# Altium PCB Suprise.PcbDoc
Units mm, origin at the board's own origin, x right, y up, seen from the top; angles counter-clockwise.
Board outline 20 x 50 mm, 2 copper layers (Top Layer, Bottom Layer); 40 components, 25 nets, 139 pads, 38 vias.
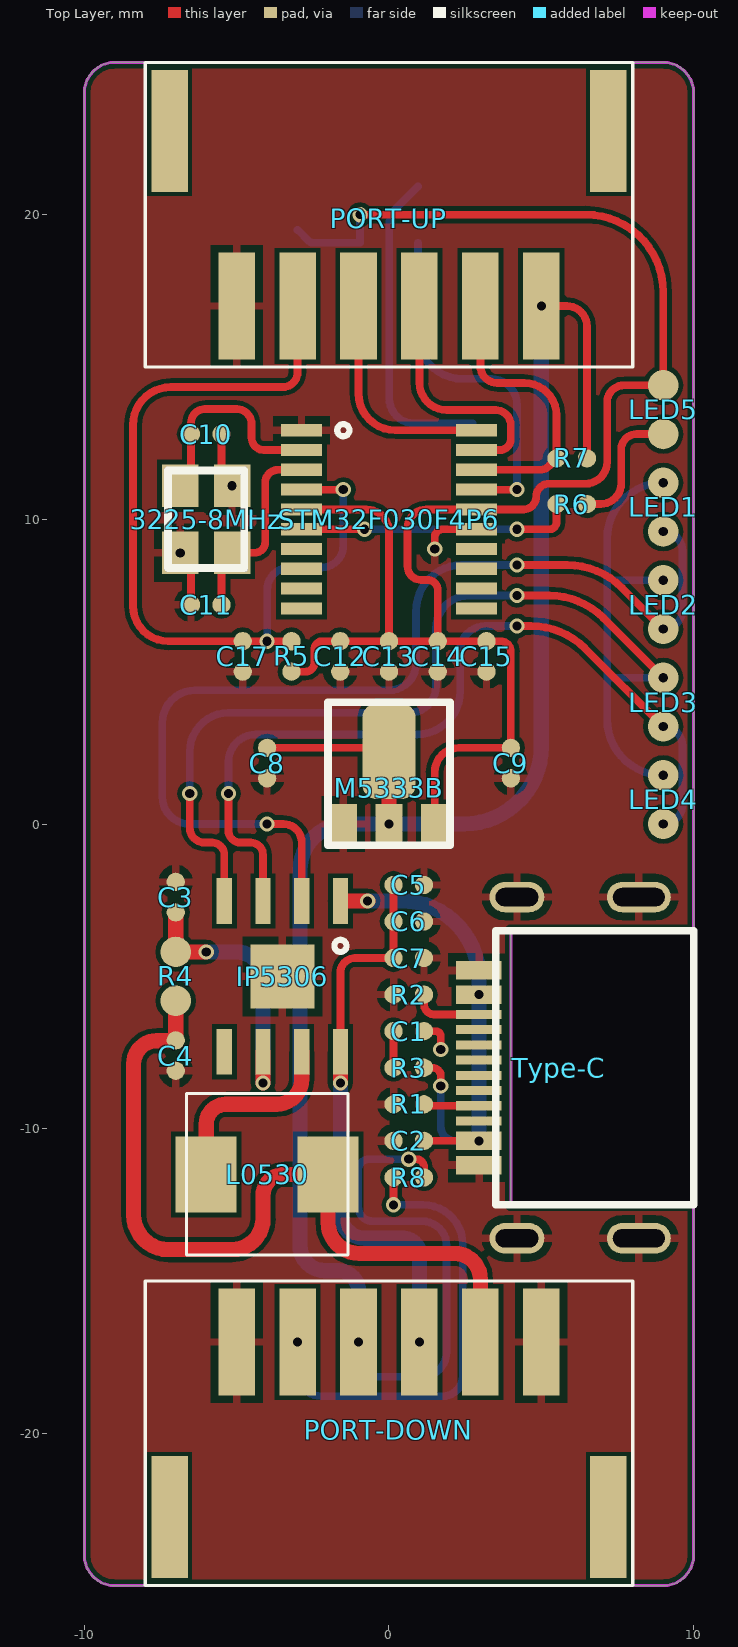
[diagram p0: Top Layer view]
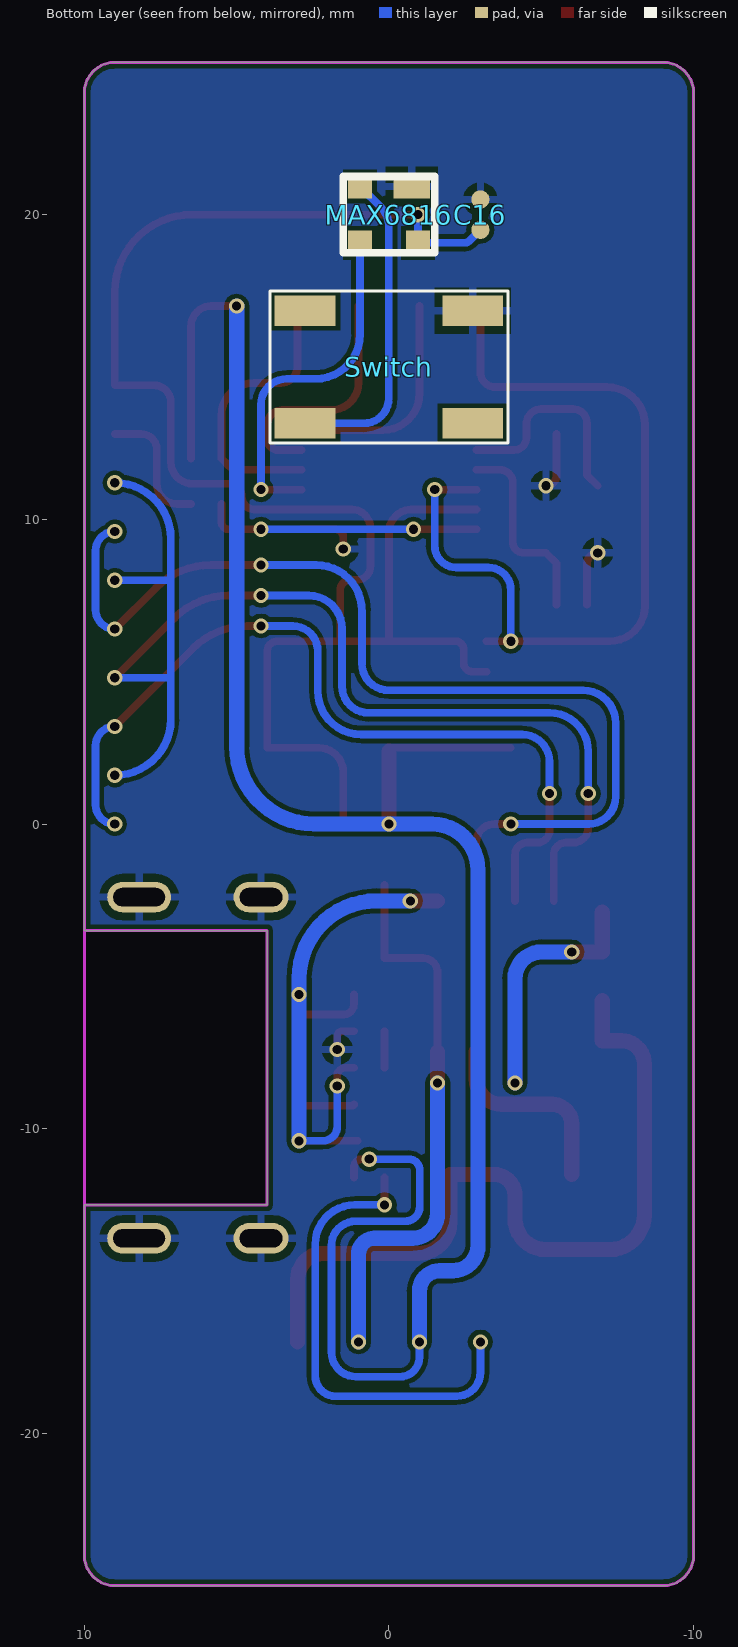
[diagram p1: Bottom Layer view, seen from below]

## Layer stack, top to bottom
Top Solder: solder mask 0.0102, Solder Resist, Dk 3.5
Top Layer: signal copper 0.0356
Dielectric 1: dielectric 0.32, FR-4, Dk 4.8
Bottom Layer: signal copper 0.0356
Bottom Solder: solder mask 0.0102, Solder Resist, Dk 3.5

## Board outline
-10,-24 -10,24 cw(c-9,24) -9,25 9,25 cw(c9,24) 10,24 10,-3.5 4,-3.5 4,-12.5 10,-12.5 10,-24 cw(c9,-24) 9,-25 -9,-25 cw(c-9,-24)

## Design rules (kind name [scope] priority, off if disabled: settings)
Clearance [All] p1: gap=0.15 ignorepadtopadclearanceinfootprint=FALSE
PolygonConnect [All] p1: connectstyle=Relief reliefconductorwidth=0.254 reliefentries=4 polygonreliefangle="90 Angle" airgapwidth=0.254
RoutingVias [All] p1: holewidth=0.711 width=1.27 viastyle="Through Hole" minholewidth=0.15 minwidth=0.3 maxholewidth=1 maxwidth=2
SolderMaskExpansion [All] p1: expansion=0.102
Width [All] p1: maxlimit=1 minlimit=0.15 preferedwidth=0.254
30 further rules are at their usual default settings.

## Components (designator, comment, footprint, x,y, rotation, side; value= is the part's Value field where it differs from the comment)
3225-8MHz "Crystal-3225" Crystal-3225 -6,10 r90 top locked
C1 "10U" CAP0402 0.65,-6.8 r90 top locked
C2 "10U" CAP0402 0.65,-10.4 r270 top locked
C3 "22U" CAP0402 -7,-2.4 r180 top locked
C4 "22U" CAP0402 -7,-7.6 r0 top locked
C5 "22U" CAP0402 0.65,-2 r90 top locked
C6 "22U" CAP0402 0.65,-3.2 r90 top locked
C7 "22U" CAP0402 0.65,-4.4 r90 top locked
C8 "106" CAP0402 -4,2 r0 top locked
C9 "107" CAP0402 4,2 r0 top locked
C10 "12P" CAP0402 -6,12.8 r90 top locked
C11 "12P" CAP0402 -6,7.2 r90 top locked
C12 "475" CAP0402 -1.6,5.5 r0 top locked
C13 "105" CAP0402 0,5.5 r0 top locked
C14 "105" CAP0402 1.6,5.5 r0 top locked
C15 "475" CAP0402 3.2,5.5 r0 top locked
C16 "105" CAP0402 -3,20 r0 bottom locked
C17 "105" CAP0402 -4.8,5.5 r0 top locked
IP5306 "IP5306" IP5306 -3.5,-5 r270 top locked
L0530 "IND0530" IND0530 -4,-11.5 r0 top locked
LED1 "LED0603" LED0603 9,10.4 r180 top locked
LED2 "LED0603" LED0603 9,7.2 r0 top locked
LED3 "LED0603" LED0603 9,4 r180 top locked
LED4 "LED0603" LED0603 9,0.8 r0 top locked
LED5 "LED0603" LED0603 9,13.6 r0 top locked
M5333B "M5333B" M5333B 0,0 r0 top locked
MAX6816 "MAX6816" MAX6816 0,20 r0 bottom locked
PORT-DOWN "PH2.0-SMD-6Pin" PH2.0-SMD-6Pin 0,-17 r180 top locked
PORT-UP "PH2.0-SMD-6Pin" PH2.0-SMD-6Pin 0,17 r0 top locked
R1 "5K1" RES0402 0.65,-9.2 r90 top locked
R2 "5K1" RES0402 0.65,-5.6 r90 top locked
R3 "2R" RES0402 0.65,-8 r90 top locked
R4 "0.5R" RES0603 -7,-5 r180 top locked
R5 "10K" RES0402 -3.2,5.5 r0 top locked
R6 "300R" RES0402 6,10.5 r270 top locked
R7 "10K" RES0402 6,12 r270 top locked
R8 "300R" RES0402 0.65,-11.6 r90 top locked
STM32F030F4P6 "STM32F030F4P6" STM32F030F4P6 0,10 r0 top locked
Switch "Key-4*4*1.5" Key-4*4*1.5 0,15 r90 bottom locked
Type-C "Type-C-IN-16Pin" SinkBoard-Type-C-IN-16Pin 2.95,-8 r270 top locked

## Footprints (in the part's own frame and the unit in brackets; to place one, negate y for a bottom-side part, rotate by r counter-clockwise, add the part's x,y. Pads: shape width x height; smd on the part's side, far side on the other; paste and mask are expansions set on the pad)
CAP0402 [mm]
  round 0.6 smd: 1(0,0.5) 2(0,-0.5)
Crystal-3225 [mm]
  rect 1.4x1.2 smd: 1(-1.1,-0.85) 2(1.1,-0.85) 3(1.1,0.85) 4(-1.1,0.85)
  silkscreen extent -1.6,-1.25 1.6,1.25
IND0530 [mm]
  rect 2x2.5 smd: 1(-2,0) 2(2,0)
  silkscreen extent -2.65,-2.65 2.65,2.65
IP5306 [mm]
  rect 1.5x0.5 smd: 1(-2.475,1.905) 2(-2.475,0.635) 3(-2.475,-0.635) 4(-2.475,-1.905) 5(2.475,-1.905) 6(2.475,-0.635) 7(2.475,0.635) 8(2.475,1.905)
  rect 2.1x2.1 smd: 9(0,0)
  silkscreen extent -1.2,1.71 -0.8,2.1
Key-4*4*1.5 [mm]
  rect 1x2 smd: 1(-1.85,2.75) 2(1.85,-2.75) 3(1.85,2.75) 4(-1.85,-2.75)
  silkscreen extent -2.5,-3.9 2.5,3.9
LED0603 [mm]
  round 1 smd: 1(0,0.8) 2(0,-0.8)
M5333B [mm]
  rect 0.9x1.3 smd: 1(-1.5,0) 2(0,0) 3(1.5,0)
  rrect50% 1.733x3.125 smd: 2(0,2.388)
  silkscreen extent -2,-0.7 2,4
MAX6816 [mm]
  rect 1.2x0.8 smd: 1(-0.75,-0.925)
  rect 0.8x0.8 smd: 2(0.95,-0.925) 3(0.95,0.925) 4(-0.95,0.925)
  silkscreen extent -1.5,-1.25 1.5,1.25
PH2.0-SMD-6Pin [mm]
  rect 1.2x3.5 smd: 1(-5,0) 2(-3,0) 3(-1,0) 4(1,0) 5(3,0) 6(5,0)
  rect 1.2x4 smd: 7(7.2,5.75) 8(-7.2,5.75)
  silkscreen extent -8,-2 8,8
RES0402 [mm]
  round 0.6 smd: 1(0,0.5) 2(0,-0.5)
RES0603 [mm]
  round 1 smd: 1(0,0.8) 2(0,-0.8)
SinkBoard-Type-C-IN-16Pin [mm]
  oval 1x2.1 hole 1.7 slot 0.6 at 0 deg: 1(-5.6,5.25) 12(5.6,5.25)
  oval 1x1.8 hole 1.4 slot 0.6 at 0 deg: 1(-5.6,1.25) 12(5.6,1.25)
  rect 0.6x1.5 smd: 1(-3.2,0) 2(-2.4,0) 11(2.4,0) 12(3.2,0)
  rect 0.3x1.5 smd: 3(-1.75,0) 4(-1.25,0) 5(-0.75,0) 6(-0.25,0) 7(0.25,0) 8(0.75,0) 9(1.25,0) 10(1.75,0)
  silkscreen extent -4.5,0.55 4.5,7.05
STM32F030F4P6 [mm]
  rect 1.35x0.4 smd: 1(-2.875,2.925) 2(-2.875,2.275) 3(-2.875,1.625) 4(-2.875,0.975) 5(-2.875,0.325) 6(-2.875,-0.325) 7(-2.875,-0.975) 8(-2.875,-1.625) 9(-2.875,-2.275) 10(-2.875,-2.925) 11(2.875,-2.925) 12(2.875,-2.275) 13(2.875,-1.625) 14(2.875,-0.975) 15(2.875,-0.325) 16(2.875,0.325) 17(2.875,0.975) 18(2.875,1.625) 19(2.875,2.275) 20(2.875,2.925)
  silkscreen extent -1.7,2.73 -1.3,3.12

## Part data
C1 C2 C3 C4 C5 C6 C7 C8 C9 C10 C11 C12 C13 C14 C15 C16 C17: library part CAP0402
R1 R2 R3 R5 R6 R7 R8: library part RES0402
R4: library part RES0603

## Via types
v1: diameter 0.5, hole 0.3, Top Layer to Bottom Layer, 38 vias

## Nets (pads, with @x,y where several pads share a name; then routed paths per layer and width w, separated by ;. In a path a pad name is that pad's centre, name@x,y a point inside that pad or via, vN(x,y) a via of type N, cw(c..) or ccw(c..) an arc to the next point about the centre after c; other vN are vias at no path point)
3V3: C9.1 C12.1 C13.1 C14.1 C15.1 C16.1 LED5.1 M5333B.3 MAX6816.4 R5.2 STM32F030F4P6.5 STM32F030F4P6.16 | length 56.7
  Top Layer w0.254: R5.2 -2.74,5 ccw(c-2.74,5.29) -2.45,5.29 -2.45,5.728 cw(c-2.178,5.728) -2.178,6 C12.1 C13.1 ; STM32F030F4P6.5 -0.742,10.325 cw(c-0.742,9.583) 0,9.583 C13.1 ; v1(-0.95,20) 6.46,20 cw(c6.46,17.46) 9,17.46 LED5.1 7.717,14.4 ccw(c7.717,13.843) 7.16,13.843 7.16,11.88 cw(c6.45,11.88) 6.45,11.17 5.26,11.17 ccw(c5.26,10.74) 4.83,10.74 cw(c4.415,10.74) 4.415,10.325 STM32F030F4P6.16 1.224,10.325 ccw(c1.224,9.711) 0.61,9.711 0.61,8.46 ccw(c1.06,8.46) 1.06,8.01 1.273,8.01 cw(c1.273,7.683) 1.6,7.683 C14.1 ; M5333B.3 1.5,1.7 cw(c2.3,1.7) 2.3,2.5 C9.1 4,5.659 ccw(c3.659,5.659) 3.659,6 C15.1 C14.1 ; C13.1 C14.1
  Bottom Layer w0.254: C16.1 -2.65,19.15 ccw(c-2.469,19.331) -2.469,19.075 MAX6816.4 v1(-0.95,20)
5VIN: C8.1 M5333B.2 PORT-DOWN.4 PORT-UP.6 R7.1 R8.2 | length 69.5
  Top Layer w0.254: C8.1 -0.112,2.5 cw(c-0.112,2.388) M5333B.2@0,2.388 ; v1(0.65,-11) 0.888,-11 cw(c0.888,-11.262) 1.15,-11.262 R8.2 ; v1(5,17) 5.832,17 cw(c5.832,16.332) 6.5,16.332 R7.1
  Top Layer w0.5: v1(0,0) M5333B.2@0,2.388
  Bottom Layer w0.254: v1(-1,-17) -1,-17.5 ccw(c-0.36,-17.5) -0.36,-18.14 1.08,-18.14 ccw(c1.08,-17.33) 1.89,-17.33 1.89,-13.835 ccw(c1.095,-13.835) 1.095,-13.04 -0.532,-13.04 cw(c-0.532,-12.562) -1.01,-12.562 -1.01,-11.361 cw(c-0.649,-11.361) -0.649,-11 v1(0.65,-11)
  Bottom Layer w0.5: v1(-1,-17) -1,-15.33 ccw(c-1.67,-15.33) -1.67,-14.66 -2.1,-14.66 cw(c-2.1,-13.839) -2.921,-13.839 -2.921,-1.514 cw(c-1.407,-1.514) -1.407,0 v1(0,0) 2.46,0 ccw(c2.46,2.54) 5,2.54 v1(5,17)
5VOUT: C5.1 C6.1 C7.1 IP5306.8 PORT-DOWN.3 | length 18.6
  Top Layer w0.254: IP5306.8 -1.595,-4.88 cw(c-1.115,-4.88) -1.115,-4.4 C7.1 C6.1 C5.1
  Top Layer w0.5: v1(-1.595,-8.5) IP5306.8
  Bottom Layer w0.5: v1(-1.595,-8.5) -1.595,-12.778 ccw(c-0.773,-12.778) -0.773,-13.6 0.48,-13.6 cw(c0.48,-14.12) 1,-14.12 v1(1,-17)
BAT: C4.1 L0530.2 PORT-DOWN.2 R4.1 | length 26.6
  Top Layer w0.254: C4.1@-7,-7.112 C4.1
  Top Layer w0.5: C4.1@-7,-7.112 -7.62,-7.112 ccw(c-7.62,-7.874) -8.382,-7.874 -8.382,-12.827 ccw(c-7.239,-12.827) -7.239,-13.97 -5.15,-13.97 ccw(c-5.15,-12.955) -4.135,-12.955 -4.135,-12.192 cw(c-3.443,-12.192) -3.443,-11.5 L0530.2 -2,-13.073 ccw(c-0.976,-13.073) -0.976,-14.097 2.159,-14.097 cw(c2.159,-14.938) 3,-14.938 PORT-DOWN.2 ; C4.1 R4.1
GND: 3225-8MHz.2 3225-8MHz.4 C1.2 C2.2 C3.2 C4.2 C5.2 C6.2 C7.2 C8.2 C9.2 C10.2 C11.1 C12.2 C13.2 C14.2 C15.2 C16.2 C17.2 IP5306.9 M5333B.1 MAX6816.1 PORT-DOWN.1 PORT-DOWN.6 PORT-UP.1 R1.1 R2.1 STM32F030F4P6.1 STM32F030F4P6.15 Switch.2 Type-C.1 Type-C.12 | length 6.8
  Top Layer w0.254: v1(-6.85,8.9) cw(c-6.85,8.55) -6.5,8.55 C11.1 ; C10.2 -5.5,11.45 ccw(c-5.15,11.45) v1(-5.15,11.1) ; C1.2 1.53,-6.8 cw(c1.53,-6.97) 1.7,-6.97 v1(1.7,-7.4) ; v1(1.5,9.025) 1.5,9.403 cw(c1.772,9.403) 1.772,9.675 STM32F030F4P6.15
Net3225-8MHz_1: 3225-8MHz.1 C11.2 STM32F030F4P6.3 | length 6.5
  Top Layer w0.254: C11.2 -5.5,8.55 3225-8MHz.1 -4.414,8.9 ccw(c-4.414,9.25) -4.064,9.25 -4.064,11.2 cw(c-3.639,11.2) -3.639,11.625 STM32F030F4P6.3
Net3225-8MHz_3: 3225-8MHz.3 C10.1 STM32F030F4P6.2 | length 7.1
  Top Layer w0.254: 3225-8MHz.3 -6.5,11.45 C10.1 -6.5,13.159 cw(c-6.039,13.159) -6.039,13.62 -5.001,13.62 cw(c-5.001,13.129) -4.51,13.129 -4.51,12.68 ccw(c-4.105,12.68) -4.105,12.275 STM32F030F4P6.2
NetC1_1: C1.1 R3.1 | length 1.2
  Top Layer w0.254: R3.1 C1.1
NetC2_1: C2.1 IP5306.1 R3.2 Type-C.2 Type-C.11 | length 17.1
  Top Layer w0.254: C2.1@1.035,-10.4 C2.1 v1(2.95,-10.4) ; R3.2 1.428,-8 cw(c1.428,-8.272) 1.7,-8.272 v1(1.7,-8.6)
  Top Layer w0.5: IP5306.1 v1(-0.7,-2.525)
  Bottom Layer w0.254: v1(1.7,-8.6) 1.7,-9.929 ccw(c2.171,-9.929) 2.171,-10.4 v1(2.95,-10.4)
  Bottom Layer w0.5: v1(-0.7,-2.525) 0.41,-2.525 cw(c0.41,-5.065) 2.95,-5.065 v1(2.95,-5.6) v1(2.95,-10.4)
NetC3_1: C3.1 IP5306.6 R4.2 | length 9.1
  Top Layer w0.5: C3.1 R4.2 v1(-6,-4.2) ; v1(-4.135,-8.5) IP5306.6
  Bottom Layer w0.5: v1(-6,-4.2) -5.011,-4.2 cw(c-5.011,-5.076) -4.135,-5.076 v1(-4.135,-8.5)
NetIP5306_2: IP5306.2 LED1.1 LED2.2 | length 34.6
  Top Layer w0.254: v1(-4,0) -3.467,0 cw(c-3.467,-0.602) -2.865,-0.602 IP5306.2 ; v1(4.2,8.5) 5.848,8.5 cw(c5.848,5.96) 7.644,7.756 v1(9,6.4)
  Bottom Layer w0.254: v1(-4,0) -6.55,0 cw(c-6.55,0.89) -7.44,0.89 -7.44,3.316 cw(c-6.366,3.316) -6.366,4.39 0.01,4.39 ccw(c0.01,5.27) 0.89,5.27 0.89,7.002 cw(c2.388,7.002) 2.388,8.5 v1(4.2,8.5) ; v1(9,6.4) ccw(c9,7.03) 9.63,7.03 9.63,8.97 ccw(c9,8.97) v1(9,9.6)
NetIP5306_3: IP5306.3 LED3.1 LED4.2 | length 27.9
  Top Layer w0.254: v1(-5.27,1) -5.27,-0.216 ccw(c-4.876,-0.216) -4.876,-0.61 -4.534,-0.61 cw(c-4.534,-1.009) -4.135,-1.009 IP5306.3 ; v1(4.2,6.5) 4.648,6.5 cw(c4.648,3.96) 6.444,5.756 v1(9,3.2)
  Bottom Layer w0.254: v1(-5.27,1) -5.27,2.037 cw(c-4.367,2.037) -4.367,2.94 0.91,2.94 ccw(c0.91,4.37) 2.34,4.37 2.34,5.68 cw(c3.16,5.68) 3.16,6.5 v1(4.2,6.5) ; v1(9,0) ccw(c9,0.63) 9.63,0.63 9.63,2.57 ccw(c9,2.57) v1(9,3.2)
NetIP5306_4: IP5306.4 LED1.2 LED2.1 LED3.2 LED4.1 | length 41.3
  Top Layer w0.254: v1(-6.54,1) -6.54,-0.12 ccw(c-6.05,-0.12) -6.05,-0.61 -5.807,-0.61 cw(c-5.807,-1.012) -5.405,-1.012 IP5306.4 ; v1(4.2,7.5) 5.248,7.5 cw(c5.248,4.96) 7.044,6.756 v1(9,4.8)
  Bottom Layer w0.254: v1(-6.54,1) -6.54,2.375 cw(c-5.265,2.375) -5.265,3.65 0.675,3.65 ccw(c0.675,4.515) 1.54,4.515 1.54,6.407 cw(c2.633,6.407) 2.633,7.5 v1(4.2,7.5) ; v1(9,1.6) cw(c9,3.44) 7.16,3.44 7.16,4.8 ; v1(9,4.8) 7.16,4.8 ; v1(9,8) 7.16,8 ; v1(9,11.2) ccw(c9,9.36) 7.16,9.36 7.16,8 ; 7.16,4.8 7.16,8
NetIP5306_7: IP5306.7 L0530.1 | length 6.5
  Top Layer w0.5: L0530.1 -6,-9.85 cw(c-5.35,-9.85) -5.35,-9.2 -3.683,-9.2 ccw(c-3.683,-8.382) -2.865,-8.382 IP5306.7
NetLED5_2: LED5.2 R6.1 | length 4.3
  Top Layer w0.254: R6.1 6.946,10.5 ccw(c6.946,11.174) 7.62,11.174 7.62,12.29 cw(c8.13,12.29) 8.13,12.8 LED5.2
NetMAX6816_2: MAX6816.2 Switch.1 | length 10.5
  Bottom Layer w0.254: MAX6816.2 0.248,20.222 ccw(c0.821,19.649) 0.01,19.649 0.01,13.97 ccw(c0.83,13.97) 0.83,13.15 Switch.1
NetMAX6816_3: MAX6816.3 STM32F030F4P6.17 | length 11.7
  Top Layer w0.254: STM32F030F4P6.17 v1(4.2,10.975)
  Bottom Layer w0.254: MAX6816.3 0.95,16.072 ccw(c2.412,16.072) 2.412,14.61 3.36,14.61 cw(c3.36,13.77) 4.2,13.77 v1(4.2,10.975)
NetPORT-DOWN_5: PORT-DOWN.5 R8.1 | length 15.5
  Top Layer w0.254: v1(0.15,-12.5) R8.1
  Bottom Layer w0.254: v1(-3,-17) -3,-18.003 ccw(c-2.223,-18.003) -2.223,-18.78 1.755,-18.78 ccw(c1.755,-18.115) 2.42,-18.115 2.42,-13.796 ccw(c1.124,-13.796) 1.124,-12.5 v1(0.15,-12.5)
NetR1_2: R1.2 Type-C.9 | length 1.8
  Top Layer w0.254: R1.2 ccw(c1.2,-9.2) 1.2,-9.25 Type-C.9
NetR2_2: R2.2 Type-C.3 | length 2.3
  Top Layer w0.254: R2.2 1.15,-5.92 ccw(c1.48,-5.92) 1.48,-6.25 Type-C.3
NetR6_2: R6.2 STM32F030F4P6.6 | length 9.1
  Top Layer w0.254: STM32F030F4P6.6 v1(-0.8,9.675) ; v1(4.2,9.675) 5.267,9.675 ccw(c5.267,9.908) 5.5,9.908 R6.2
  Bottom Layer w0.254: v1(-0.8,9.675) v1(4.2,9.675)
RGB: PORT-UP.5 R7.2 STM32F030F4P6.18 | length 9.6
  Top Layer w0.254: STM32F030F4P6.18 4.948,11.625 ccw(c4.948,12.052) 5.25,11.75 R7.2 5.5,13.413 ccw(c4.435,13.413) 4.435,14.478 3.552,14.478 cw(c3.552,15.03) 3,15.03 PORT-UP.5
RST: C17.1 PORT-UP.2 R5.1 STM32F030F4P6.4 | length 28.6
  Top Layer w0.254: R5.1 v1(-4,6) C17.1 -7.245,6 cw(c-7.245,7.155) -8.4,7.155 -8.4,13.101 cw(c-7.161,13.101) -7.161,14.34 -3.49,14.34 ccw(c-3.49,14.83) -3,14.83 PORT-UP.2 ; STM32F030F4P6.4 v1(-1.5,10.975)
  Bottom Layer w0.254: v1(-4,6) -4,7.68 cw(c-3.26,7.68) -3.26,8.42 -2.215,8.42 ccw(c-2.215,9.135) -1.5,9.135 v1(-1.5,10.975)
SWCLK: PORT-UP.3 STM32F030F4P6.20 | length 7.4
  Top Layer w0.254: PORT-UP.3 -1,14.131 ccw(c0.206,14.131) 0.206,12.925 STM32F030F4P6.20
SWDIO: PORT-UP.4 STM32F030F4P6.19 | length 8.1
  Top Layer w0.254: PORT-UP.4 1,14.483 ccw(c1.894,14.483) 1.894,13.589 3.492,13.589 cw(c3.492,13.081) 4,13.081 4,12.638 cw(c3.637,12.638) 3.637,12.275 STM32F030F4P6.19
pads on no net: IP5306.5 PORT-DOWN.7 PORT-DOWN.8 PORT-UP.7 PORT-UP.8 STM32F030F4P6.7 STM32F030F4P6.8 STM32F030F4P6.9 STM32F030F4P6.10 STM32F030F4P6.11 STM32F030F4P6.12 STM32F030F4P6.13 STM32F030F4P6.14 Switch.3 Switch.4 Type-C.4 Type-C.5 Type-C.6 Type-C.7 Type-C.8 Type-C.10

## Polygon pours and split planes (outlines as drawn)
GND on Top Layer "TopGND" (solid, remove dead copper, pour order 9): -10,-24 -10,24 cw(c-9,24) -9,25 9,25 cw(c9,24) 10,24 10,-3.5 4,-3.5 4,-12.5 10,-12.5 10,-24 cw(c9,-24) 9,-25 -9,-25 cw(c-9,-24)
GND on Bottom Layer "BotGND" (solid, remove dead copper, pour order 10): -10,-24 -10,24 cw(c-9,24) -9,25 9,25 cw(c9,24) 10,24 10,-3.5 4,-3.5 4,-12.5 10,-12.5 10,-24 cw(c9,-24) 9,-25 -9,-25 cw(c-9,-24)

## Keep-outs
Keep-Out Layer:
  lines w0.1: 10,-24 cw(c9,-24) 9,-25 -9,-25 cw(c-9,-24) -10,-24 -10,24 cw(c-9,24) -9,25 9,25 cw(c9,24) 10,24 ; 10,-24 10,-12.5 4,-12.5 4,-3.5 10,-3.5 10,24 ; 10,-24 10,24

## Silkscreen, mask and mechanical layers (free items; w line width, h text height)
Top Solder:
  text "绍寅" at -7.5,0.5 h3 r90
Mechanical 1:
  the board outline again, w0.1